# Altium PCB PCB1.PcbDoc
Units mil, origin at the board's own origin, x right, y up, seen from the top; angles counter-clockwise.
Board outline 6185 x 4245 mil, 2 copper layers (Top Layer, Bottom Layer); 97 components, 65 nets, 266 pads, 39 vias.
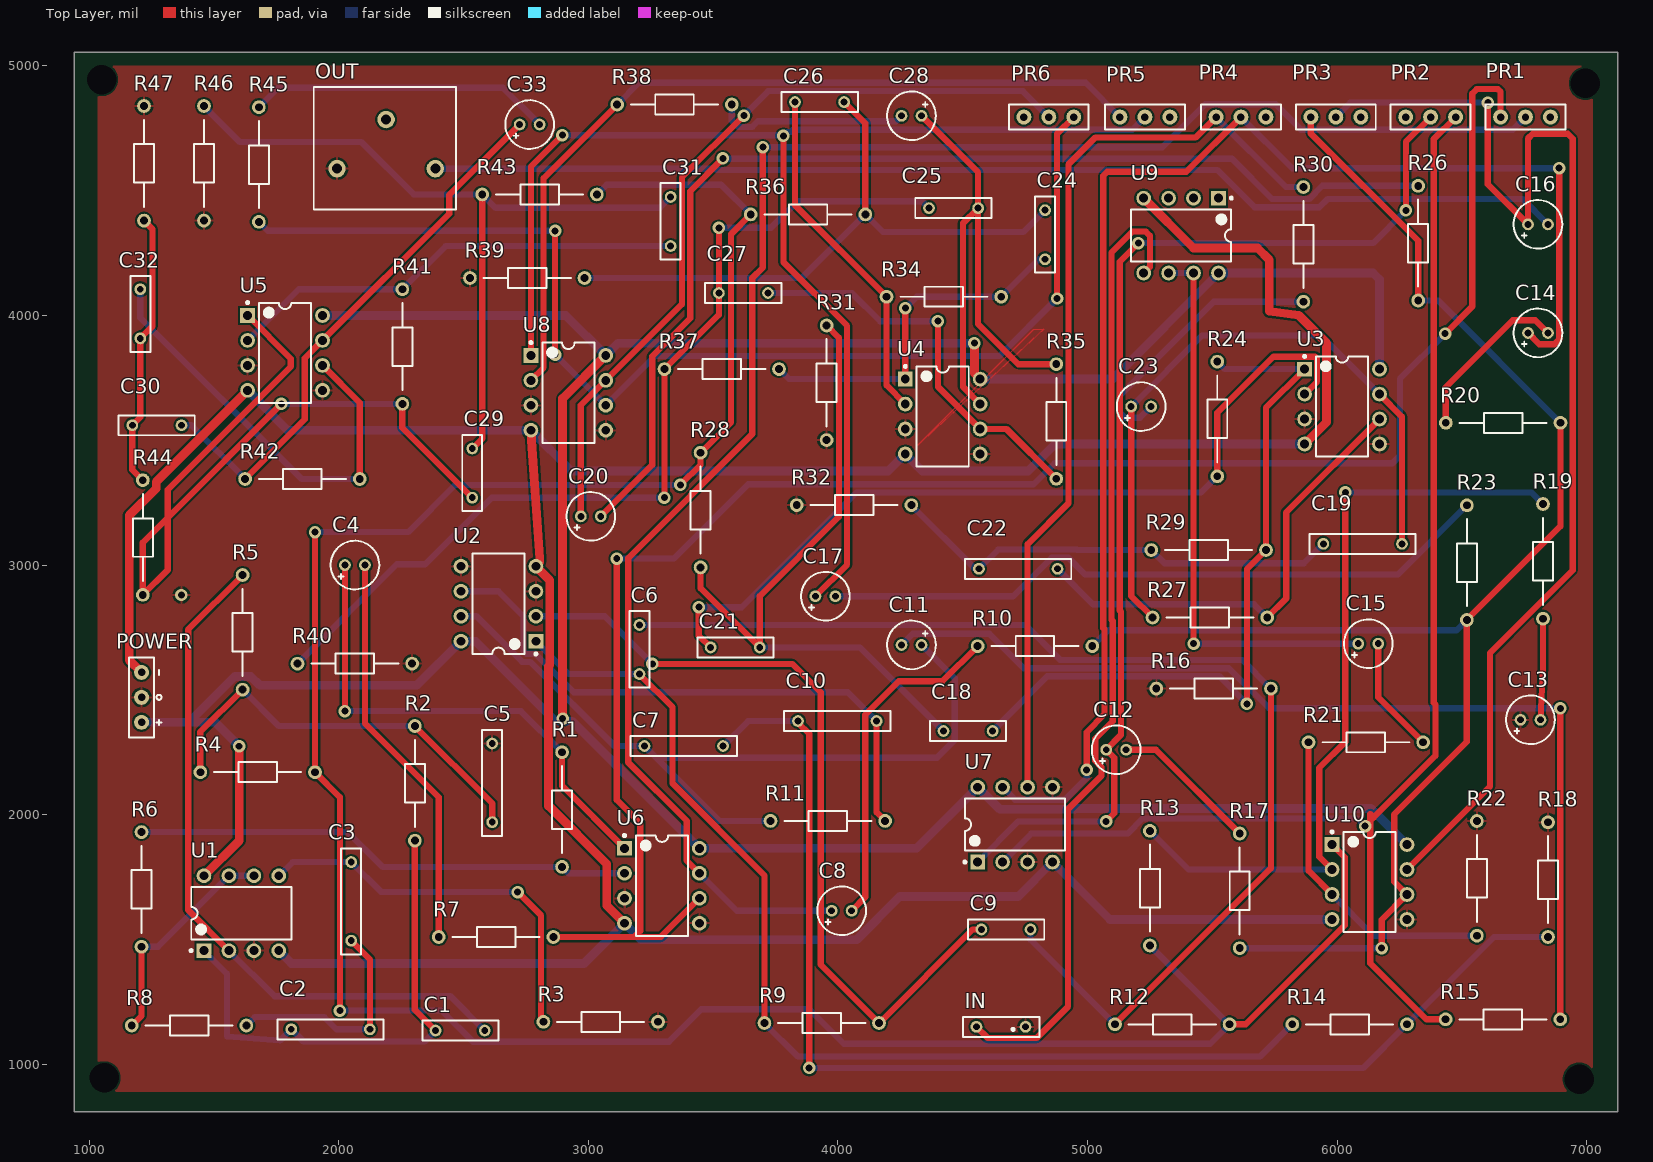
[diagram p0: Top Layer view]
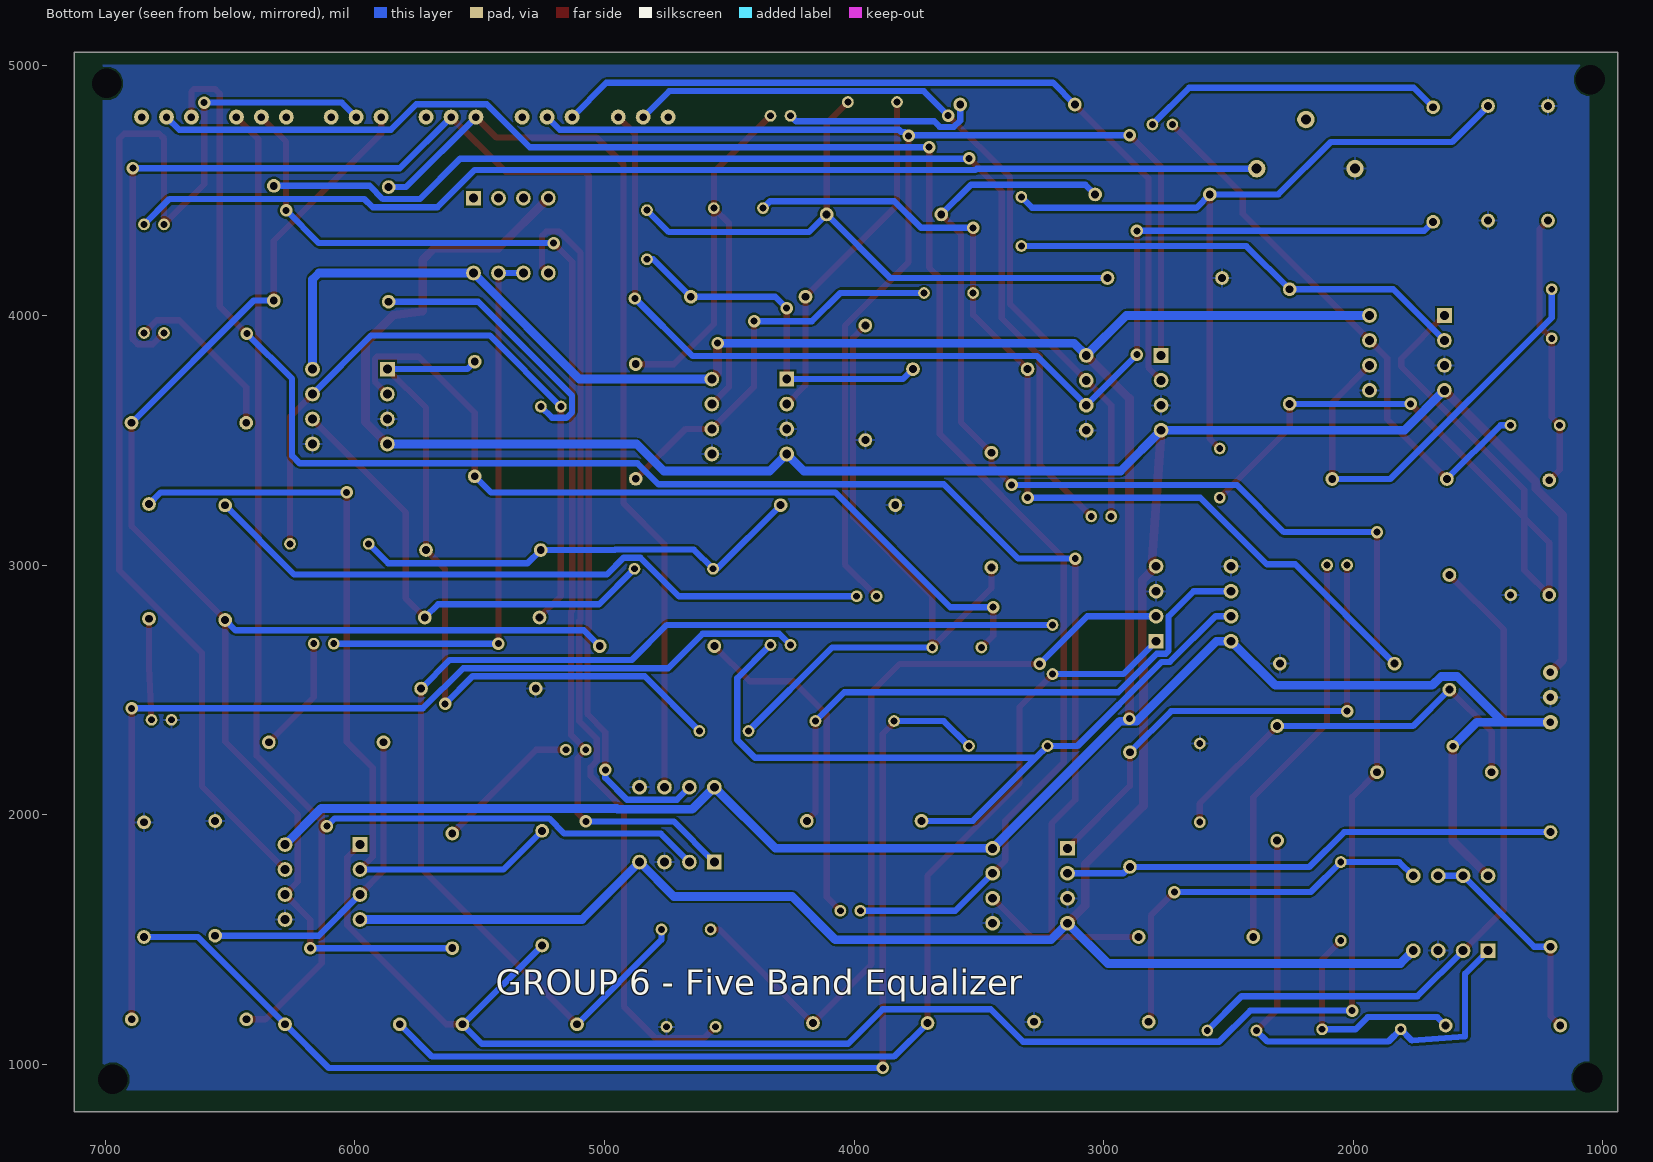
[diagram p1: Bottom Layer view, seen from below]
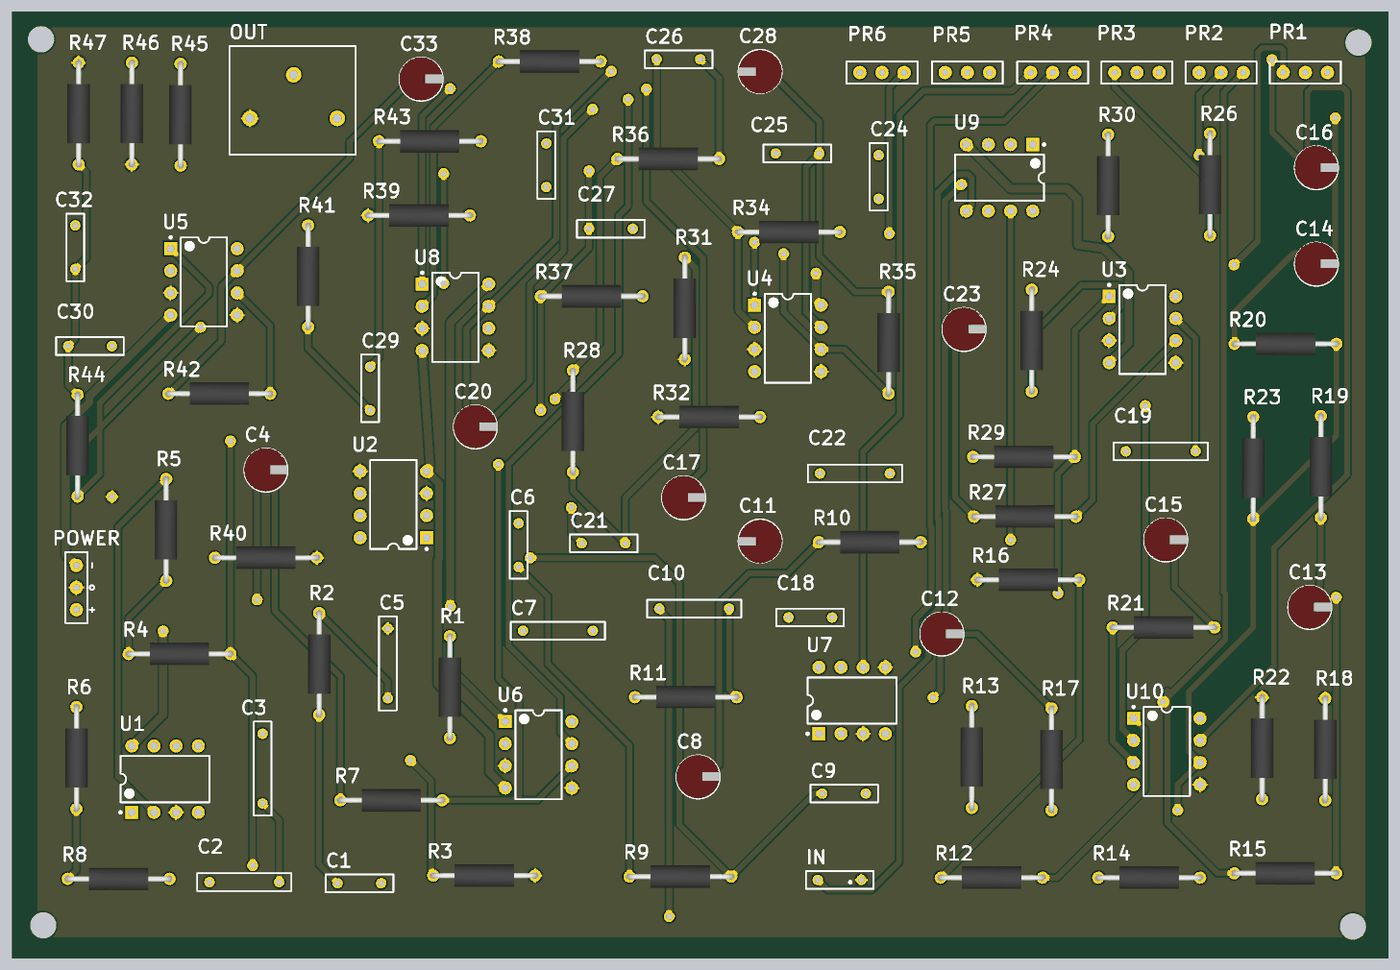
[diagram p2: 3D render of the assembled board from above, using the file's embedded part models]

## Layer stack, top to bottom
Top Solder: solder mask 0.4, Solder Resist, Dk 3.5
Top Layer: signal copper 1.4
Dielectric 1: dielectric 12.6, FR-4, Dk 4.8
Bottom Layer: signal copper 1.4
Bottom Solder: solder mask 0.4, Solder Resist, Dk 3.5

## Board outline
940,810 7125,810 7125,5055 940,5055

## Design rules (kind name [scope] priority, off if disabled: settings)
Clearance [All] p1: gap=8 ignorepadtopadclearanceinfootprint=FALSE
PolygonConnect [All] p1: connectstyle=Relief reliefconductorwidth=10 reliefentries=4 polygonreliefangle="90 Angle" airgapwidth=10
RoutingVias [All] p1: holewidth=28 width=50 viastyle="Through Hole" minholewidth=28 minwidth=50 maxholewidth=28 maxwidth=50
SolderMaskExpansion [All] p1: expansion=4 istentingtop=FALSE
Width [InNetClass('power')] p1: maxlimit=40 minlimit=20 preferedwidth=35
Width Width_1 [InNetClass('All Nets')] p2: maxlimit=40 minlimit=15 preferedwidth=25
30 further rules are at their usual default settings.

## Classes and differential pairs
net class without_gnd: "-10 V" NetC1_1 NetC1_2 NetC2_2 NetC3_2 NetC4_1 NetC4_2 NetC5_2 NetC6_1 NetC6_2 NetC7_1 NetC7_2 NetC8_1 NetC8_2 NetC9_2 NetC10_2 NetC11_2 NetC12_1 NetC12_2 NetC13_2 NetC14_1 NetC14_2 NetC15_1 NetC15_2 NetC16_1 NetC16_2 NetC17_1 NetC17_2 NetC18_1 NetC18_2 NetC19_1 NetC19_2 NetC20_1 NetC20_2 NetC21_2 NetC22_2 NetC23_2 NetC24_1 NetC24_2 NetC25_1 NetC25_2 NetC26_2 NetC27_2 NetC28_2 NetC29_1 NetC29_2 NetC30_1 NetC30_2 NetC31_2 NetC32_2 NetC33_2 NetIN_2 NetPR1_1 NetPR2_1 NetPR3_1 NetPR4_1 NetPR5_1 NetPR6_1 NetR1_1 NetR4_1 NetR6_1 NetR13_1 NetR21_2 VCC
net class power: "-10 V" VCC

## Components (designator, comment, footprint, x,y, rotation, side; value= is the part's Value field where it differs from the comment)
C1 "22nF" 10NF 2585,1135 r180 top
C2 "470nF" 100NF 1810,1140 r0 top
C3 "470nF" 100NF 2050,1495.04 r90 top
C4 "10uF" 10UF 2025,3000 r0 top
C5 "100nF" 100NF 2615,2285 r270 top
C6 "15nF" 10NF 3205,2760 r270 top
C7 "100nF" 100NF 3540,2275 r180 top
C8 "10uF" 10UF 3975,1615 r0 top
C9 "15nF" 10NF 4771.85,1540 r180 top
C10 "100nF" 100NF 3840,2375 r0 top
C11 "10uF" 10UF 4335,2680 r180 top
C12 "10uF" 10UF 5075,2260 r0 top
C13 "10uF" 10UF 6735,2380 r0 top
C14 "10uF" 10UF 6765,3930 r0 top
C15 "10uF" 10UF 6085,2685 r0 top
C16 "10uF" 10UF 6765,4365 r0 top
C17 "10uF" 10UF 3910,2875 r0 top
C18 "10nF" 10NF 4423.15,2335 r0 top
C19 "100nF" 100NF 5945.04,3085 r0 top
C20 "10uF" 10UF 2970,3195 r0 top
C21 "10nF" 10NF 3686.85,2670 r180 top
C22 "100nF" 100NF 4565.04,2985 r0 top
C23 "10uF" 10UF 5175,3635 r0 top
C24 "10nF" 10NF 4830,4421.85 r270 top
C25 "20nF" 10NF 4365,4430 r0 top
C26 "10nF" 10NF 4025,4855 r180 top
C27 "20nF" 10NF 3523.15,4090 r0 top
C28 "10uF" 10UF 4335,4800 r180 top
C29 "3.3nF" 10NF 2535,3466.85 r270 top
C30 "33nF" 10NF 1173.15,3560 r0 top
C31 "3.3nF" 10NF 3330,4475 r270 top
C32 "33nF" 10NF 1205,3908.15 r90 top
C33 "10uF" 10UF 2725,4765 r0 top
IN "IN" AUDIO_IN 4751.85,1150 r180 top
OUT "OUT" AUDIO_OUT 2190,4785 r270 top
POWER "POWER" POWER 1210,2370 r90 top
PR1 "10K VAR" POT 6655,4795 r0 top
PR2 "10K VAR" POT 6475,4795 r180 top
PR3 "10K VAR" POT 5895,4795 r0 top
PR4 "10K VAR" POT 5515,4795 r0 top
PR5 "10K VAR" POT 5130,4795 r0 top
PR6 "10K VAR" POT 4945,4795 r180 top
R1 "1K" RESI 2895,1790.67 r90 top
R2 "15K" RESI 2305,2355 r270 top
R3 "24K" RESI 2820,1170 r0 top
R4 "15K" RESI 1905,2170 r180 top
R5 "7.5K" RESI 1615,2500.67 r90 top
R6 "1K" RESI 1210,1470.67 r90 top
R7 "1K" RESI 2400.67,1510 r0 top
R8 "12K" RESI 1630,1155 r180 top
R9 "30K" RESI 4165,1165 r180 top
R10 "1K" RESI 4560,2675 r0 top
R11 "12K" RESI 4189.33,1975 r180 top
R12 "9.1K" RESI 5569.33,1160 r180 top
R13 "1K" RESI 5250,1935 r270 top
R14 "3.6K" RESI 5820.67,1160 r0 top
R15 "1K" RESI 6894.33,1180 r180 top
R16 "10K" RESI 5275.67,2505 r0 top
R17 "1K" RESI 5610,1924.33 r270 top
R18 "3.9K" RESI 6845,1969.33 r270 top
R19 "1K" RESI 6825,2785 r90 top
R20 "1K" RESI 6435.67,3570 r0 top
R21 "1K" RESI 6345,2290 r180 top
R22 "1K" RESI 6560,1974.33 r270 top
R23 "1K" RESI 6520,3239.33 r270 top
R24 "10K" RESI 5520,3355.67 r90 top
R26 "1K" RESI 6325,4519.33 r270 top
R27 "3K" RESI 5720,2790 r180 top
R28 "3K" RESI 3450,3450 r270 top
R29 "910 OHM" RESI 5715,3060 r180 top
R30 "1K" RESI 5865,4055 r90 top
R31 "6.8K" RESI 3955,3500.67 r90 top
R32 "2K" RESI 3835,3240 r0 top
R34 "5.6K" RESI 4195,4075 r0 top
R35 "5.6K" RESI 4875,3345.67 r90 top
R36 "1.8K" RESI 3650.67,4405 r0 top
R37 "1.8K" RESI 3764.33,3785 r180 top
R38 "1K" RESI 3575,4845 r180 top
R39 "820 OHM" RESI 2525.67,4150 r0 top
R40 "820 OHM" RESI 2294.33,2605 r180 top
R41 "11K" RESI 2255,4105 r270 top
R42 "1.8K" RESI 2084.33,3345 r180 top
R43 "3.6K" RESI 3034.33,4485 r180 top
R44 "620 OHM" RESI 1215,2880.67 r90 top
R45 "1K" RESI 1680,4834.33 r270 top
R46 "750 OHM" RESI 1460,4380 r90 top
R47 "130 OHM" RESI 1220,4839.33 r270 top
U1 "TL072CP" TL0072CP 1610,1605 r90 top
U2 "TL072CP" TL0072CP 2640,2845 r180 top
U3 "TL072CP" TL0072CP 6020,3635 r0 top
U4 "TL072CP" TL0072CP 4420,3595 r0 top
U5 "TL072CP" TL0072CP 1785,3850 r0 top
U6 "NE5532P" NE5532P 3295,1715 r0 top
U7 "NE5532P" NE5532P 4710,1960 r90 top
U8 "NE5532P" NE5532P 2920,3690 r0 top
U9 "TL072CP" TL0072CP 5375,4320 r270 top
U10 "NE5532P" NE5532P 6130,1730 r0 top

## Footprints (in the part's own frame and the unit in brackets; to place one, negate y for a bottom-side part, rotate by r counter-clockwise, add the part's x,y. Pads: shape width x height; smd on the part's side, far side on the other; paste and mask are expansions set on the pad)
10NF [mm]
  round 1.2 hole 0.7: 1(0,0) 2(5,0)
  silkscreen extent -1.4,-1.02 6.35,1.02
10UF [mm]
  round 1.2 hole 0.7: 1(0,0) 2(2.032,0)
  silkscreen extent -1.46,-2.48 3.49,2.48, body extent -1.5,-2.46 3.53,2.54, height 12.51
100NF [mm]
  round 1.2 hole 0.7: 1(0,0) 2(8,0)
  silkscreen extent -1.4,-1.02 9.4,1.02
AUDIO_IN [mm]
  round 1.2 hole 0.7: 1(0,0) 2(5,0)
  silkscreen extent -1.4,-1.02 6.35,1.02
AUDIO_OUT [mil]
  round 70 hole 40: 1(0,0) 2(196.85,-196.85) 3(196.85,196.85)
  silkscreen extent -130,-290 360,280
NE5532P [mm] "DIP, 8-Leads, Body 10.15x6.6mm, Pitch 2.54mm"
  rect 1.5x1.5 hole 0.9: 1(-3.81,3.81)
  round 1.5 hole 0.9: 2(-3.81,1.27) 3(-3.81,-1.27) 4(-3.81,-3.81) 5(3.81,-3.81) 6(3.81,-1.27) 7(3.81,1.27) 8(3.81,3.81)
  silkscreen extent -3.93,-5.1 2.65,5.23, body extent -3.95,-5.07 3.95,5.07, height 5.08
POT [mil]
  round 60 hole 30: 1(0,0) 2(100,0) 3(200,0)
  silkscreen extent -60,-50 260,50
POWER [mil]
  round 60 hole 30: 1(0,0) 2(100,0) 3(200,0)
  silkscreen extent -60,-80 260,50
RESI [mm]
  round 1.4 hole 0.8: 1(0,0) 2(11.667,0)
  silkscreen extent 1.4,-1.02 10.27,1.02, body extent -0.31,-1.29 11.99,1.29, height 2.58
TL0072CP [mm] "DIP, 8-Leads, Body 10.15x6.6mm, Pitch 2.54mm"
  rect 1.5x1.5 hole 0.9: 1(-3.81,3.81)
  round 1.5 hole 0.9: 2(-3.81,1.27) 3(-3.81,-1.27) 4(-3.81,-3.81) 5(3.81,-3.81) 6(3.81,-1.27) 7(3.81,1.27) 8(3.81,3.81)
  silkscreen extent -3.93,-5.1 2.65,5.23, body extent -3.95,-5.07 3.95,5.07, height 5.08

## Part data
C1 C2 C3 C6 C9 C18 C21 C24 C25 C26 C27 C29 C30 C31 C32: Capacitance=100nF, Case/Package=Radial, Manufacturer=Nichicon, Manufacturer Part Number=UKW1H0R1MDD1TD, Max Operating Temperature=85°C, Min Operating Temperature=-40°C, Package Quantity=1, Ripple Current=1.1mA, Supplier Part Number 1=493-10793-1-ND, Tolerance=20%, Voltage Rating=50V, Category="Aluminum Electrolytic Capacitors", ComponentLink1Description=https://datasheet.ciiva.com/29550/e-kw-29550927.pdf?src-supplier=Digi-Key, ComponentLink1URL=https://datasheet.ciiva.com/29550/e-kw-29550927.pdf?src-supplier=Digi-Key, Height - Seated (Max)=0.492inch, Lead Pitch=0.079inch, Life (Hours)=2000Hour, Mount="Through Hole", Packaging="Cut Tape", Pricing 1="1=0.39000, 10=0.26600, 50=0.17720, 100=0.15050, 500=0.10626, 1000=0.09298 (USD)", RoHS=Yes, RoHS Compliant=Yes, Stock 1=3707, Supplier 1=Digi-Key
C4 C8 C11 C12 C13 C14 C15 C16 C17 C20 C23 C28 C33: "YXF series 50V 10uF 5x11mm LS=2mm 105'C 10k HRS Aluminum Electrolytic Capacitor", Case/Package=Radial, Dielectric Material=Aluminium, Manufacturer=Rubycon, Manufacturer Part Number=50YXF10MEFC5X11, Max Operating Temperature=105°C, Min Operating Temperature=-40°C, Package Quantity=3000, Ripple Current=100mA, Supplier Part Number 1=1189-1852-ND, Tolerance=20%, Voltage Rating=50V, Capacitance=10uF, Category="Aluminum Electrolytic Capacitors", ComponentLink1Description=https://datasheet.ciiva.com/7976/e-yxf-7976037.pdf?src-supplier=Element14, ComponentLink1URL=https://datasheet.ciiva.com/7976/e-yxf-7976037.pdf?src-supplier=Element14, ComponentLink2Description=https://datasheet.ciiva.com/6310/e-yxf-6310901.pdf?src-supplier=Digi-Key, ComponentLink2URL=https://datasheet.ciiva.com/6310/e-yxf-6310901.pdf?src-supplier=Digi-Key, Diameter=5mm, Height=11mm, Height - Seated (Max)=0.492inch, Impedance=1.5R, Lead Pitch=2mm, Life (Hours)=5000Hour, Mount="Through Hole", Packaging=Bulk, Pricing 1="1=0.31000, 10=0.21000, 50=0.12580, 100=0.10620, 500=0.07266, 1000=0.06427, 2500=0.06148, 5000=0.05589 (USD)", Radiation Hardening=No, RoHS=Yes, RoHS Compliant=Yes, Series=YXF, Stock 1=126340, Supplier 1=Digi-Key, Termination=Radial
C5 C7 C10 C19 C22: Case/Package=Radial, Manufacturer=Nichicon, Manufacturer Part Number=UKW1H0R1MDD1TD, Max Operating Temperature=85°C, Min Operating Temperature=-40°C, Package Quantity=1, Ripple Current=1.1mA, Supplier Part Number 1=493-10793-1-ND, Tolerance=20%, Voltage Rating=50V, Capacitance=100nF, Category="Aluminum Electrolytic Capacitors", ComponentLink1Description=https://datasheet.ciiva.com/29550/e-kw-29550927.pdf?src-supplier=Digi-Key, ComponentLink1URL=https://datasheet.ciiva.com/29550/e-kw-29550927.pdf?src-supplier=Digi-Key, Height - Seated (Max)=0.492inch, Lead Pitch=0.079inch, Life (Hours)=2000Hour, Mount="Through Hole", Packaging="Cut Tape", Pricing 1="1=0.39000, 10=0.26600, 50=0.17720, 100=0.15050, 500=0.10626, 1000=0.09298 (USD)", RoHS=Yes, RoHS Compliant=Yes, Stock 1=3707, Supplier 1=Digi-Key
IN: library part A_IN
OUT: library part AUDIO
R1 R6 R7 R10 R13 R15 R17 R19 R20 R21 R22 R23 R26 R30 R38 R45: "RES 1K OHM 5% 1/2W AXIAL", Case/Package=Axial, Manufacturer=Yageo, Manufacturer Part Number=CFR-25JB-52-10K, Max Operating Temperature=155°C, Max Power Dissipation=250mW, Min Operating Temperature=-55°C, Package Quantity=200, Resistance=10kR, Resistor Type="Carbon Film", Supplier Part Number 1=CF14JT1K00CT-ND, Temperature Coefficient=500ppm/°C, Tolerance=5%, Category="Through-Hole Resistors", ComponentLink1Description=http://www.yageo.com/NewPortal/yageodocoutput?fileName=/pdf/throughhole/Yageo_LR_CFR_2013.pdf&src-supplier=Digi-Key, ComponentLink1URL=http://www.yageo.com/NewPortal/yageodocoutput?fileName=/pdf/throughhole/Yageo_LR_CFR_2013.pdf&src-supplier=Digi-Key, Lead Free="Lead Free", Length=0.248inch, Number of Terminations=2, Packaging=Bulk, Pricing 1="1=0.10000, 10=0.06800, 25=0.04680, 50=0.03640, 100=0.02600, 250=0.02028, 500=0.01612, 1000=0.01144, 5000=0.00884 (USD)", RoHS=Yes, RoHS Compliant=Yes, Series="Carbon Film", Stock 1=199228, Supplier 1=Digi-Key
R2 R4: "RES 15K OHM 5% 1/2W AXIAL", Case/Package=Axial, Manufacturer=Yageo, Manufacturer Part Number=CFR-25JB-52-10K, Max Operating Temperature=155°C, Max Power Dissipation=250mW, Min Operating Temperature=-55°C, Package Quantity=200, Resistance=10kR, Resistor Type="Carbon Film", Supplier Part Number 1=10KQBK-ND, Temperature Coefficient=500ppm/°C, Tolerance=5%, Category="Through-Hole Resistors", ComponentLink1Description=http://www.yageo.com/NewPortal/yageodocoutput?fileName=/pdf/throughhole/Yageo_LR_CFR_2013.pdf&src-supplier=Digi-Key, ComponentLink1URL=http://www.yageo.com/NewPortal/yageodocoutput?fileName=/pdf/throughhole/Yageo_LR_CFR_2013.pdf&src-supplier=Digi-Key, Lead Free="Lead Free", Length=0.248inch, Number of Terminations=2, Packaging=Bulk, Pricing 1="1=0.10000, 10=0.06800, 25=0.04680, 50=0.03640, 100=0.02600, 250=0.02028, 500=0.01612, 1000=0.01144, 5000=0.00884 (USD)", RoHS=Yes, RoHS Compliant=Yes, Series="Carbon Film", Stock 1=199228, Supplier 1=Digi-Key
R3: "RES 24K OHM 5% 1/2W AXIAL", Case/Package=Axial, Manufacturer=Yageo, Manufacturer Part Number=CFR-25JB-52-10K, Max Operating Temperature=155°C, Max Power Dissipation=250mW, Min Operating Temperature=-55°C, Package Quantity=200, Resistance=10kR, Resistor Type="Carbon Film", Supplier Part Number 1=10KQBK-ND, Temperature Coefficient=500ppm/°C, Tolerance=5%, Category="Through-Hole Resistors", ComponentLink1Description=http://www.yageo.com/NewPortal/yageodocoutput?fileName=/pdf/throughhole/Yageo_LR_CFR_2013.pdf&src-supplier=Digi-Key, ComponentLink1URL=http://www.yageo.com/NewPortal/yageodocoutput?fileName=/pdf/throughhole/Yageo_LR_CFR_2013.pdf&src-supplier=Digi-Key, Lead Free="Lead Free", Length=0.248inch, Number of Terminations=2, Packaging=Bulk, Pricing 1="1=0.10000, 10=0.06800, 25=0.04680, 50=0.03640, 100=0.02600, 250=0.02028, 500=0.01612, 1000=0.01144, 5000=0.00884 (USD)", RoHS=Yes, RoHS Compliant=Yes, Series="Carbon Film", Stock 1=199228, Supplier 1=Digi-Key
R5: "RES 7.5K OHM 5% 1/2W AXIAL", Case/Package=Axial, Manufacturer=Yageo, Manufacturer Part Number=CFR-25JB-52-10K, Max Operating Temperature=155°C, Max Power Dissipation=250mW, Min Operating Temperature=-55°C, Package Quantity=200, Resistance=10kR, Resistor Type="Carbon Film", Supplier Part Number 1=10KQBK-ND, Temperature Coefficient=500ppm/°C, Tolerance=5%, Category="Through-Hole Resistors", ComponentLink1Description=http://www.yageo.com/NewPortal/yageodocoutput?fileName=/pdf/throughhole/Yageo_LR_CFR_2013.pdf&src-supplier=Digi-Key, ComponentLink1URL=http://www.yageo.com/NewPortal/yageodocoutput?fileName=/pdf/throughhole/Yageo_LR_CFR_2013.pdf&src-supplier=Digi-Key, Lead Free="Lead Free", Length=0.248inch, Number of Terminations=2, Packaging=Bulk, Pricing 1="1=0.10000, 10=0.06800, 25=0.04680, 50=0.03640, 100=0.02600, 250=0.02028, 500=0.01612, 1000=0.01144, 5000=0.00884 (USD)", RoHS=Yes, RoHS Compliant=Yes, Series="Carbon Film", Stock 1=199228, Supplier 1=Digi-Key
R8 R11: "RES 12K OHM 5% 1/2W AXIAL", Case/Package=Axial, Manufacturer=Yageo, Manufacturer Part Number=CFR-25JB-52-10K, Max Operating Temperature=155°C, Max Power Dissipation=250mW, Min Operating Temperature=-55°C, Package Quantity=200, Resistance=10kR, Resistor Type="Carbon Film", Supplier Part Number 1=10KQBK-ND, Temperature Coefficient=500ppm/°C, Tolerance=5%, Category="Through-Hole Resistors", ComponentLink1Description=http://www.yageo.com/NewPortal/yageodocoutput?fileName=/pdf/throughhole/Yageo_LR_CFR_2013.pdf&src-supplier=Digi-Key, ComponentLink1URL=http://www.yageo.com/NewPortal/yageodocoutput?fileName=/pdf/throughhole/Yageo_LR_CFR_2013.pdf&src-supplier=Digi-Key, Lead Free="Lead Free", Length=0.248inch, Number of Terminations=2, Packaging=Bulk, Pricing 1="1=0.10000, 10=0.06800, 25=0.04680, 50=0.03640, 100=0.02600, 250=0.02028, 500=0.01612, 1000=0.01144, 5000=0.00884 (USD)", RoHS=Yes, RoHS Compliant=Yes, Series="Carbon Film", Stock 1=199228, Supplier 1=Digi-Key
R9: "RES 30K OHM 5% 1/2W AXIAL", Case/Package=Axial, Manufacturer=Yageo, Manufacturer Part Number=CFR-25JB-52-10K, Max Operating Temperature=155°C, Max Power Dissipation=250mW, Min Operating Temperature=-55°C, Package Quantity=200, Resistance=10kR, Resistor Type="Carbon Film", Supplier Part Number 1=10KQBK-ND, Temperature Coefficient=500ppm/°C, Tolerance=5%, Category="Through-Hole Resistors", ComponentLink1Description=http://www.yageo.com/NewPortal/yageodocoutput?fileName=/pdf/throughhole/Yageo_LR_CFR_2013.pdf&src-supplier=Digi-Key, ComponentLink1URL=http://www.yageo.com/NewPortal/yageodocoutput?fileName=/pdf/throughhole/Yageo_LR_CFR_2013.pdf&src-supplier=Digi-Key, Lead Free="Lead Free", Length=0.248inch, Number of Terminations=2, Packaging=Bulk, Pricing 1="1=0.10000, 10=0.06800, 25=0.04680, 50=0.03640, 100=0.02600, 250=0.02028, 500=0.01612, 1000=0.01144, 5000=0.00884 (USD)", RoHS=Yes, RoHS Compliant=Yes, Series="Carbon Film", Stock 1=199228, Supplier 1=Digi-Key
R12: "RES 9.1K OHM 5% 1/2W AXIAL", Case/Package=Axial, Manufacturer=Yageo, Manufacturer Part Number=CFR-25JB-52-10K, Max Operating Temperature=155°C, Max Power Dissipation=250mW, Min Operating Temperature=-55°C, Package Quantity=200, Resistance=10kR, Resistor Type="Carbon Film", Supplier Part Number 1=10KQBK-ND, Temperature Coefficient=500ppm/°C, Tolerance=5%, Category="Through-Hole Resistors", ComponentLink1Description=http://www.yageo.com/NewPortal/yageodocoutput?fileName=/pdf/throughhole/Yageo_LR_CFR_2013.pdf&src-supplier=Digi-Key, ComponentLink1URL=http://www.yageo.com/NewPortal/yageodocoutput?fileName=/pdf/throughhole/Yageo_LR_CFR_2013.pdf&src-supplier=Digi-Key, Lead Free="Lead Free", Length=0.248inch, Number of Terminations=2, Packaging=Bulk, Pricing 1="1=0.10000, 10=0.06800, 25=0.04680, 50=0.03640, 100=0.02600, 250=0.02028, 500=0.01612, 1000=0.01144, 5000=0.00884 (USD)", RoHS=Yes, RoHS Compliant=Yes, Series="Carbon Film", Stock 1=199228, Supplier 1=Digi-Key
R14 R43: "RES 3.6K OHM 5% 1/2W AXIAL", Case/Package=Axial, Manufacturer=Yageo, Manufacturer Part Number=CFR-25JB-52-10K, Max Operating Temperature=155°C, Max Power Dissipation=250mW, Min Operating Temperature=-55°C, Package Quantity=200, Resistance=10kR, Resistor Type="Carbon Film", Supplier Part Number 1=10KQBK-ND, Temperature Coefficient=500ppm/°C, Tolerance=5%, Category="Through-Hole Resistors", ComponentLink1Description=http://www.yageo.com/NewPortal/yageodocoutput?fileName=/pdf/throughhole/Yageo_LR_CFR_2013.pdf&src-supplier=Digi-Key, ComponentLink1URL=http://www.yageo.com/NewPortal/yageodocoutput?fileName=/pdf/throughhole/Yageo_LR_CFR_2013.pdf&src-supplier=Digi-Key, Lead Free="Lead Free", Length=0.248inch, Number of Terminations=2, Packaging=Bulk, Pricing 1="1=0.10000, 10=0.06800, 25=0.04680, 50=0.03640, 100=0.02600, 250=0.02028, 500=0.01612, 1000=0.01144, 5000=0.00884 (USD)", RoHS=Yes, RoHS Compliant=Yes, Series="Carbon Film", Stock 1=199228, Supplier 1=Digi-Key
R16 R24: "RES 10K OHM 5% 1/2W AXIAL", Case/Package=Axial, Manufacturer=Yageo, Manufacturer Part Number=CFR-25JB-52-10K, Max Operating Temperature=155°C, Max Power Dissipation=250mW, Min Operating Temperature=-55°C, Package Quantity=200, Resistance=10kR, Resistor Type="Carbon Film", Supplier Part Number 1=10KQBK-ND, Temperature Coefficient=500ppm/°C, Tolerance=5%, Category="Through-Hole Resistors", ComponentLink1Description=http://www.yageo.com/NewPortal/yageodocoutput?fileName=/pdf/throughhole/Yageo_LR_CFR_2013.pdf&src-supplier=Digi-Key, ComponentLink1URL=http://www.yageo.com/NewPortal/yageodocoutput?fileName=/pdf/throughhole/Yageo_LR_CFR_2013.pdf&src-supplier=Digi-Key, Lead Free="Lead Free", Length=0.248inch, Number of Terminations=2, Packaging=Bulk, Pricing 1="1=0.10000, 10=0.06800, 25=0.04680, 50=0.03640, 100=0.02600, 250=0.02028, 500=0.01612, 1000=0.01144, 5000=0.00884 (USD)", RoHS=Yes, RoHS Compliant=Yes, Series="Carbon Film", Stock 1=199228, Supplier 1=Digi-Key
R18: "RES 3.9K OHM 5% 1/2W AXIAL", Case/Package=Axial, Manufacturer=Yageo, Manufacturer Part Number=CFR-25JB-52-10K, Max Operating Temperature=155°C, Max Power Dissipation=250mW, Min Operating Temperature=-55°C, Package Quantity=200, Resistance=10kR, Resistor Type="Carbon Film", Supplier Part Number 1=10KQBK-ND, Temperature Coefficient=500ppm/°C, Tolerance=5%, Category="Through-Hole Resistors", ComponentLink1Description=http://www.yageo.com/NewPortal/yageodocoutput?fileName=/pdf/throughhole/Yageo_LR_CFR_2013.pdf&src-supplier=Digi-Key, ComponentLink1URL=http://www.yageo.com/NewPortal/yageodocoutput?fileName=/pdf/throughhole/Yageo_LR_CFR_2013.pdf&src-supplier=Digi-Key, Lead Free="Lead Free", Length=0.248inch, Number of Terminations=2, Packaging=Bulk, Pricing 1="1=0.10000, 10=0.06800, 25=0.04680, 50=0.03640, 100=0.02600, 250=0.02028, 500=0.01612, 1000=0.01144, 5000=0.00884 (USD)", RoHS=Yes, RoHS Compliant=Yes, Series="Carbon Film", Stock 1=199228, Supplier 1=Digi-Key
R27 R28: "RES 3K OHM 5% 1/2W AXIAL", Case/Package=Axial, Manufacturer=Yageo, Manufacturer Part Number=CFR-25JB-52-10K, Max Operating Temperature=155°C, Max Power Dissipation=250mW, Min Operating Temperature=-55°C, Package Quantity=200, Resistance=10kR, Resistor Type="Carbon Film", Supplier Part Number 1=10KQBK-ND, Temperature Coefficient=500ppm/°C, Tolerance=5%, Category="Through-Hole Resistors", ComponentLink1Description=http://www.yageo.com/NewPortal/yageodocoutput?fileName=/pdf/throughhole/Yageo_LR_CFR_2013.pdf&src-supplier=Digi-Key, ComponentLink1URL=http://www.yageo.com/NewPortal/yageodocoutput?fileName=/pdf/throughhole/Yageo_LR_CFR_2013.pdf&src-supplier=Digi-Key, Lead Free="Lead Free", Length=0.248inch, Number of Terminations=2, Packaging=Bulk, Pricing 1="1=0.10000, 10=0.06800, 25=0.04680, 50=0.03640, 100=0.02600, 250=0.02028, 500=0.01612, 1000=0.01144, 5000=0.00884 (USD)", RoHS=Yes, RoHS Compliant=Yes, Series="Carbon Film", Stock 1=199228, Supplier 1=Digi-Key
R29: "RES 910 OHM 5% 1/2W AXIAL", Case/Package=Axial, Manufacturer=Yageo, Manufacturer Part Number=CFR-25JB-52-10K, Max Operating Temperature=155°C, Max Power Dissipation=250mW, Min Operating Temperature=-55°C, Package Quantity=200, Resistance=10kR, Resistor Type="Carbon Film", Supplier Part Number 1=10KQBK-ND, Temperature Coefficient=500ppm/°C, Tolerance=5%, Category="Through-Hole Resistors", ComponentLink1Description=http://www.yageo.com/NewPortal/yageodocoutput?fileName=/pdf/throughhole/Yageo_LR_CFR_2013.pdf&src-supplier=Digi-Key, ComponentLink1URL=http://www.yageo.com/NewPortal/yageodocoutput?fileName=/pdf/throughhole/Yageo_LR_CFR_2013.pdf&src-supplier=Digi-Key, Lead Free="Lead Free", Length=0.248inch, Number of Terminations=2, Packaging=Bulk, Pricing 1="1=0.10000, 10=0.06800, 25=0.04680, 50=0.03640, 100=0.02600, 250=0.02028, 500=0.01612, 1000=0.01144, 5000=0.00884 (USD)", RoHS=Yes, RoHS Compliant=Yes, Series="Carbon Film", Stock 1=199228, Supplier 1=Digi-Key
R31: "RES 6.8K OHM 5% 1/2W AXIAL", Case/Package=Axial, Manufacturer=Yageo, Manufacturer Part Number=CFR-25JB-52-10K, Max Operating Temperature=155°C, Max Power Dissipation=250mW, Min Operating Temperature=-55°C, Package Quantity=200, Resistance=10kR, Resistor Type="Carbon Film", Supplier Part Number 1=10KQBK-ND, Temperature Coefficient=500ppm/°C, Tolerance=5%, Category="Through-Hole Resistors", ComponentLink1Description=http://www.yageo.com/NewPortal/yageodocoutput?fileName=/pdf/throughhole/Yageo_LR_CFR_2013.pdf&src-supplier=Digi-Key, ComponentLink1URL=http://www.yageo.com/NewPortal/yageodocoutput?fileName=/pdf/throughhole/Yageo_LR_CFR_2013.pdf&src-supplier=Digi-Key, Lead Free="Lead Free", Length=0.248inch, Number of Terminations=2, Packaging=Bulk, Pricing 1="1=0.10000, 10=0.06800, 25=0.04680, 50=0.03640, 100=0.02600, 250=0.02028, 500=0.01612, 1000=0.01144, 5000=0.00884 (USD)", RoHS=Yes, RoHS Compliant=Yes, Series="Carbon Film", Stock 1=199228, Supplier 1=Digi-Key
R32: "RES 2K OHM 5% 1/2W AXIAL", Case/Package=Axial, Manufacturer=Yageo, Manufacturer Part Number=CFR-25JB-52-10K, Max Operating Temperature=155°C, Max Power Dissipation=250mW, Min Operating Temperature=-55°C, Package Quantity=200, Resistance=10kR, Resistor Type="Carbon Film", Supplier Part Number 1=10KQBK-ND, Temperature Coefficient=500ppm/°C, Tolerance=5%, Category="Through-Hole Resistors", ComponentLink1Description=http://www.yageo.com/NewPortal/yageodocoutput?fileName=/pdf/throughhole/Yageo_LR_CFR_2013.pdf&src-supplier=Digi-Key, ComponentLink1URL=http://www.yageo.com/NewPortal/yageodocoutput?fileName=/pdf/throughhole/Yageo_LR_CFR_2013.pdf&src-supplier=Digi-Key, Lead Free="Lead Free", Length=0.248inch, Number of Terminations=2, Packaging=Bulk, Pricing 1="1=0.10000, 10=0.06800, 25=0.04680, 50=0.03640, 100=0.02600, 250=0.02028, 500=0.01612, 1000=0.01144, 5000=0.00884 (USD)", RoHS=Yes, RoHS Compliant=Yes, Series="Carbon Film", Stock 1=199228, Supplier 1=Digi-Key
R34 R35: "RES 5.6K OHM 5% 1/2W AXIAL", Case/Package=Axial, Manufacturer=Yageo, Manufacturer Part Number=CFR-25JB-52-10K, Max Operating Temperature=155°C, Max Power Dissipation=250mW, Min Operating Temperature=-55°C, Package Quantity=200, Resistance=10kR, Resistor Type="Carbon Film", Supplier Part Number 1=10KQBK-ND, Temperature Coefficient=500ppm/°C, Tolerance=5%, Category="Through-Hole Resistors", ComponentLink1Description=http://www.yageo.com/NewPortal/yageodocoutput?fileName=/pdf/throughhole/Yageo_LR_CFR_2013.pdf&src-supplier=Digi-Key, ComponentLink1URL=http://www.yageo.com/NewPortal/yageodocoutput?fileName=/pdf/throughhole/Yageo_LR_CFR_2013.pdf&src-supplier=Digi-Key, Lead Free="Lead Free", Length=0.248inch, Number of Terminations=2, Packaging=Bulk, Pricing 1="1=0.10000, 10=0.06800, 25=0.04680, 50=0.03640, 100=0.02600, 250=0.02028, 500=0.01612, 1000=0.01144, 5000=0.00884 (USD)", RoHS=Yes, RoHS Compliant=Yes, Series="Carbon Film", Stock 1=199228, Supplier 1=Digi-Key
R36 R37 R42: "RES 1.8K OHM 5% 1/2W AXIAL", Case/Package=Axial, Manufacturer=Yageo, Manufacturer Part Number=CFR-25JB-52-10K, Max Operating Temperature=155°C, Max Power Dissipation=250mW, Min Operating Temperature=-55°C, Package Quantity=200, Resistance=10kR, Resistor Type="Carbon Film", Supplier Part Number 1=10KQBK-ND, Temperature Coefficient=500ppm/°C, Tolerance=5%, Category="Through-Hole Resistors", ComponentLink1Description=http://www.yageo.com/NewPortal/yageodocoutput?fileName=/pdf/throughhole/Yageo_LR_CFR_2013.pdf&src-supplier=Digi-Key, ComponentLink1URL=http://www.yageo.com/NewPortal/yageodocoutput?fileName=/pdf/throughhole/Yageo_LR_CFR_2013.pdf&src-supplier=Digi-Key, Lead Free="Lead Free", Length=0.248inch, Number of Terminations=2, Packaging=Bulk, Pricing 1="1=0.10000, 10=0.06800, 25=0.04680, 50=0.03640, 100=0.02600, 250=0.02028, 500=0.01612, 1000=0.01144, 5000=0.00884 (USD)", RoHS=Yes, RoHS Compliant=Yes, Series="Carbon Film", Stock 1=199228, Supplier 1=Digi-Key
R39 R40: "RES 820 OHM 5% 1/2W AXIAL", Case/Package=Axial, Manufacturer=Yageo, Manufacturer Part Number=CFR-25JB-52-10K, Max Operating Temperature=155°C, Max Power Dissipation=250mW, Min Operating Temperature=-55°C, Package Quantity=200, Resistance=10kR, Resistor Type="Carbon Film", Supplier Part Number 1=10KQBK-ND, Temperature Coefficient=500ppm/°C, Tolerance=5%, Category="Through-Hole Resistors", ComponentLink1Description=http://www.yageo.com/NewPortal/yageodocoutput?fileName=/pdf/throughhole/Yageo_LR_CFR_2013.pdf&src-supplier=Digi-Key, ComponentLink1URL=http://www.yageo.com/NewPortal/yageodocoutput?fileName=/pdf/throughhole/Yageo_LR_CFR_2013.pdf&src-supplier=Digi-Key, Lead Free="Lead Free", Length=0.248inch, Number of Terminations=2, Packaging=Bulk, Pricing 1="1=0.10000, 10=0.06800, 25=0.04680, 50=0.03640, 100=0.02600, 250=0.02028, 500=0.01612, 1000=0.01144, 5000=0.00884 (USD)", RoHS=Yes, RoHS Compliant=Yes, Series="Carbon Film", Stock 1=199228, Supplier 1=Digi-Key
R41: "RES 11K OHM 5% 1/2W AXIAL", Case/Package=Axial, Manufacturer=Yageo, Manufacturer Part Number=CFR-25JB-52-10K, Max Operating Temperature=155°C, Max Power Dissipation=250mW, Min Operating Temperature=-55°C, Package Quantity=200, Resistance=10kR, Resistor Type="Carbon Film", Supplier Part Number 1=10KQBK-ND, Temperature Coefficient=500ppm/°C, Tolerance=5%, Category="Through-Hole Resistors", ComponentLink1Description=http://www.yageo.com/NewPortal/yageodocoutput?fileName=/pdf/throughhole/Yageo_LR_CFR_2013.pdf&src-supplier=Digi-Key, ComponentLink1URL=http://www.yageo.com/NewPortal/yageodocoutput?fileName=/pdf/throughhole/Yageo_LR_CFR_2013.pdf&src-supplier=Digi-Key, Lead Free="Lead Free", Length=0.248inch, Number of Terminations=2, Packaging=Bulk, Pricing 1="1=0.10000, 10=0.06800, 25=0.04680, 50=0.03640, 100=0.02600, 250=0.02028, 500=0.01612, 1000=0.01144, 5000=0.00884 (USD)", RoHS=Yes, RoHS Compliant=Yes, Series="Carbon Film", Stock 1=199228, Supplier 1=Digi-Key
R44: "RES 620 OHM 5% 1/2W AXIAL", Case/Package=Axial, Manufacturer=Yageo, Manufacturer Part Number=CFR-25JB-52-10K, Max Operating Temperature=155°C, Max Power Dissipation=250mW, Min Operating Temperature=-55°C, Package Quantity=200, Resistance=10kR, Resistor Type="Carbon Film", Supplier Part Number 1=10KQBK-ND, Temperature Coefficient=500ppm/°C, Tolerance=5%, Category="Through-Hole Resistors", ComponentLink1Description=http://www.yageo.com/NewPortal/yageodocoutput?fileName=/pdf/throughhole/Yageo_LR_CFR_2013.pdf&src-supplier=Digi-Key, ComponentLink1URL=http://www.yageo.com/NewPortal/yageodocoutput?fileName=/pdf/throughhole/Yageo_LR_CFR_2013.pdf&src-supplier=Digi-Key, Lead Free="Lead Free", Length=0.248inch, Number of Terminations=2, Packaging=Bulk, Pricing 1="1=0.10000, 10=0.06800, 25=0.04680, 50=0.03640, 100=0.02600, 250=0.02028, 500=0.01612, 1000=0.01144, 5000=0.00884 (USD)", RoHS=Yes, RoHS Compliant=Yes, Series="Carbon Film", Stock 1=199228, Supplier 1=Digi-Key
R46: "RES 750 OHM 5% 1/2W AXIAL", Case/Package=Axial, Manufacturer=Yageo, Manufacturer Part Number=CFR-25JB-52-10K, Max Operating Temperature=155°C, Max Power Dissipation=250mW, Min Operating Temperature=-55°C, Package Quantity=200, Resistance=10kR, Resistor Type="Carbon Film", Supplier Part Number 1=10KQBK-ND, Temperature Coefficient=500ppm/°C, Tolerance=5%, Category="Through-Hole Resistors", ComponentLink1Description=http://www.yageo.com/NewPortal/yageodocoutput?fileName=/pdf/throughhole/Yageo_LR_CFR_2013.pdf&src-supplier=Digi-Key, ComponentLink1URL=http://www.yageo.com/NewPortal/yageodocoutput?fileName=/pdf/throughhole/Yageo_LR_CFR_2013.pdf&src-supplier=Digi-Key, Lead Free="Lead Free", Length=0.248inch, Number of Terminations=2, Packaging=Bulk, Pricing 1="1=0.10000, 10=0.06800, 25=0.04680, 50=0.03640, 100=0.02600, 250=0.02028, 500=0.01612, 1000=0.01144, 5000=0.00884 (USD)", RoHS=Yes, RoHS Compliant=Yes, Series="Carbon Film", Stock 1=199228, Supplier 1=Digi-Key
R47: "RES 130 OHM 5% 1/2W AXIAL", Case/Package=Axial, Manufacturer=Yageo, Manufacturer Part Number=CFR-25JB-52-10K, Max Operating Temperature=155°C, Max Power Dissipation=250mW, Min Operating Temperature=-55°C, Package Quantity=200, Resistance=10kR, Resistor Type="Carbon Film", Supplier Part Number 1=10KQBK-ND, Temperature Coefficient=500ppm/°C, Tolerance=5%, Category="Through-Hole Resistors", ComponentLink1Description=http://www.yageo.com/NewPortal/yageodocoutput?fileName=/pdf/throughhole/Yageo_LR_CFR_2013.pdf&src-supplier=Digi-Key, ComponentLink1URL=http://www.yageo.com/NewPortal/yageodocoutput?fileName=/pdf/throughhole/Yageo_LR_CFR_2013.pdf&src-supplier=Digi-Key, Lead Free="Lead Free", Length=0.248inch, Number of Terminations=2, Packaging=Bulk, Pricing 1="1=0.10000, 10=0.06800, 25=0.04680, 50=0.03640, 100=0.02600, 250=0.02028, 500=0.01612, 1000=0.01144, 5000=0.00884 (USD)", RoHS=Yes, RoHS Compliant=Yes, Series="Carbon Film", Stock 1=199228, Supplier 1=Digi-Key
U1 U2 U3 U4 U5 U9: "Dual Low-Noise JFET-Input General-Purpose Operational Amplifier, 7 to 36 V, 0 to 70 degC, 8-pin DIP (P8), Pb-Free (RoHS)", Manufacturer="Texas Instruments", Rating=Catalog, Total Supply Voltage(Max)(+5V is 5, +/-5V is 10)=36, Total Supply Voltage(Min)(+5V is 5, +/-5V is 10)=7, CMRR(Min)(dB)=70, Code_JEDEC=MS-001, ComponentLink1Description="Manufacturer URL", ComponentLink1URL=http://www.ti.com/, ComponentLink2Description=Datasheet, ComponentLink2URL=http://www.ti.com/lit/ds/symlink/tl072.pdf, ComponentLink3Description="Package Specification", ComponentLink3URL=http://www.ti.com/litv/pdf/mpdi001b, DatasheetVersion=SLOS080J, Eco-Plan="Pb-Free (RoHS)", GBW(Typ)(MHz)=3, IIB(Max)(pA)=200, Iq per channel(Max)(mA)=2.5, Mounting Technology="Through Hole", Number of Channels=2, Offset Drift(Typ)(uV/C)=18, PackageDescription="8-Pin Plastic In-Line, Body 9.59 x 6.35 mm, Pitch 2.54 mm", PackageReference=P0008A, PackageVersion="4040082/E, 04/2010", PartNumber=TL072CP, Slew Rate(Typ)(V/us)=13, Sub Family="General Purpose Amplifier, High Supply Voltage Amplifier (>=30V)", Vio (25C)(Max)(mV)=10, Vn at 1kHz(Typ)(nV/rtHz)=18
U6 U7 U8 U10: "Dual Low-Noise High-Speed Audio Operational Amplifier, 10 to 30 V, 0 to 70 degC, 8-pin DIP (P8), Pb-Free (RoHS)", Manufacturer="Texas Instruments", Total Supply Voltage(Max)(+5V is 5, +/-5V is 10)=30, Total Supply Voltage(Min)(+5V is 5, +/-5V is 10)=10, CMRR(Min)(dB)=70, Code_JEDEC=MS-001, ComponentLink1Description="Manufacturer URL", ComponentLink1URL=http://www.ti.com/, ComponentLink2Description=Datasheet, ComponentLink2URL=http://www.ti.com/lit/ds/symlink/ne5532.pdf, ComponentLink3Description="Package Specification", ComponentLink3URL=http://www.ti.com/litv/pdf/mpdi001b, DatasheetVersion=SLOS075I, Eco-Plan="Pb-Free (RoHS)", GBW(Typ)(MHz)=10, IIB(Max)(pA)=800000, Iq per channel(Max)(mA)=4, Mounting Technology="Through Hole", Number of Channels=2, PackageDescription="8-Pin Plastic In-Line, Body 9.59 x 6.35 mm, Pitch 2.54 mm", PackageReference=P0008A, PackageVersion="4040082/E, 04/2010", PartNumber=NE5532P, Slew Rate(Typ)(V/us)=9, Sub Family="General Purpose Amplifier, High Supply Voltage Amplifier (>=30V), Low Noise Amp (<=10nV/rtHz)", Vio (25C)(Max)(mV)=4, Vn at 1kHz(Typ)(nV/rtHz)=5

## Free pads (board coordinates)
  round 60 hole 118.11: 16(1050,4945) 17(1060,945) 18(6970,940) 19(6995,4930)

## Via types
v1: diameter 50, hole 28, Top Layer to Bottom Layer, 39 vias

## Nets (pads, with @x,y where several pads share a name; then routed paths per layer and width w, separated by ;. In a path a pad name is that pad's centre, name@x,y a point inside that pad or via, vN(x,y) a via of type N, cw(c..) or ccw(c..) an arc to the next point about the centre after c; other vN are vias at no path point)
"-10 V": POWER.3 U1.4 U2.4 U3.4 U4.4 U5.4 U6.4 U7.4 U8.4 U9.4 U10.4 | length 14037.9
  Top Layer w35: POWER.3 1161,2619 1161,3199 1269,3307 1269,3334 U5.4 ; U8.4 2772.74,3499.8 2805.05,3026.56 2805.05,3012.25 2796.42,3002.36 U2.4 2846,2939 2846,2599.87 2841,2594.87 2841,2035 3074,1802 3074,1636 U6.4 ; U9.4 5425,4270 5681,4270 5728,4223 5728,4017 5846,4001 5958.03,3888.97 5958.03,3573.03 U3.4
  Bottom Layer w35: U5.4 1795,3540 U8.4 2933,3377 4202,3377 U4.4 4337.88,3377.12 4763.12,3377.12 4871,3485 U3.4 ; U1.4 1811,1404 2984,1404 U6.4 3211,1499 4075,1499 4248,1672 4722,1672 U7.4 5090,1580 U10.4
GND: C5.1 C13.1 IN.1 OUT.2 POWER.2 R3.2 R16.1 R18.1 R22.1 R31.1 R32.1 R39.1 R40.1 R46.1 R47.1 U1.3 U2.3 U2.5 U3.3 U3.5 U4.3 U4.5 U5.3 U5.5 U6.3 U6.5 U7.3 U7.5 U8.3 U8.5 U10.5
  other v1: 1370,2880
NetC1_1: C1.1 R5.2 U1.2 | length 2820.4
  Top Layer w25: U1.2 1397,1618 1397,2742 R5.2
  Bottom Layer w25: U1.2 1743,1272 2448,1272 C1.1
NetC1_2: C1.2 C2.1 R2.2 U1.1 | length 2071.1
  Top Layer w25: R2.2 2305,1218.15 C1.2
  Bottom Layer w25: U1.1 1552,1363 1552,1111 1765,1095 C2.1 1859,1091 2344.15,1091 C1.2
NetC2_2: C2.2 C3.1 R8.1 | length 915.4
  Top Layer w25: C3.1 2124.96,1420.08 C2.2
  Bottom Layer w25: R8.1 1664,1189 1942,1189 1991,1140 C2.2
NetC3_2: C3.2 R3.1 U1.5 | length 1597.4
  Top Layer w25: v1(2717,1690) 2811,1596 2811,1170 R3.1
  Bottom Layer w25: U1.5 1815,1810 C3.2 2170,1690 v1(2717,1690)
NetC4_1: C4.1 R1.2 U6.1 | length 2011.9
  Top Layer w25: v1(2025,2415) C4.1 ; R1.2 2895,2115 U6.1
  Bottom Layer w25: v1(2025,2415) 2730,2415 R1.2
NetC4_2: C4.2 R7.1 | length 1612.5
  Top Layer w25: C4.2 2105,2365.67 2400.67,2070 R7.1
NetC5_2: C5.2 R2.1 R4.2 R5.1 | length 1664.5
  Top Layer w25: R4.2 1445.67,2331.34 R5.1 ; R2.1 2615,2045 C5.2
  Bottom Layer w25: R5.1 1760.67,2355 R2.1
NetC6_1: C6.1 C9.1 R12.2 R16.2 | length 4759.6
  Top Layer w25: R12.2 5735,1785 R16.2
  Bottom Layer w25: C6.1 4750,2760 4890,2620 5620,2620 R16.2 ; C9.1 4771.85,1498.15 R12.2
NetC6_2: C6.2 R9.2 R14.1 U2.1 | length 4299.5
  Top Layer w25: C6.2 3337.63,2430.52 3337.63,2124.71 3705.67,1756.67 R9.2
  Bottom Layer w25: U2.1 2921.85,2563.15 C6.2 ; R9.2 3840.17,1030.5 5691.17,1030.5 R14.1
NetC7_1: C7.1 C10.1 R14.2 R18.2 | length 4927.5
  Top Layer w25: C10.1 3840,2368.99 3885,2323.99 v1(3885,985)
  Bottom Layer w25: C7.1 3640,2375 C10.1 ; v1(3885,985) 6105,985 R14.2 6630,1510 R18.2
NetC7_2: C7.2 C11.1 R11.2 U2.7 | length 3241.1
  Bottom Layer w25: U2.7 2551.97,2795 2735,2611.97 2768.03,2611.97 3105,2275 C7.2 3272.04,2228 ; R11.2 3525.04,1975 3272.04,2228 ; C11.1 4468,2547 4468,2299 4397,2228 3272.04,2228
NetC8_1: C8.1 PR1.2 U6.7 | length 7033.1
  Top Layer w25: U6.7 3394,1816 3394,1975 3160,2209 3160,3028 3657,3525 3657,4150 3699,4192 v1(3699,4674)
  Bottom Layer w25: U6.7 3595,1615 C8.1 ; v1(3699,4674) 5300,4674 5472,4846 5754,4846 5856,4744 6704,4744 PR1.2
NetC8_2: C8.2 R10.1 | length 1371.7
  Top Layer w25: C8.2 4110,1670 4110,2400 4244,2534 4419,2534 R10.1
NetC9_2: C9.2 R9.1 U2.2 | length 3254.6
  Top Layer w25: v1(3257,2604) 3817,2604 3930.88,2490.12 3930.88,1399.12 R9.1 4540,1540 C9.2
  Bottom Layer w25: U2.2 3066,2795 v1(3257,2604)
NetC10_2: C10.2 R11.1 U2.6 | length 2376
  Top Layer w25: C10.2 4154.96,2009.37 R11.1
  Bottom Layer w25: U2.6 2639.97,2895 2739.97,2795 2739.97,2656 2751,2644.97 2787.03,2644.97 2942,2490 4039.96,2490 C10.2
NetC11_2: C11.2 R15.1 | length 4027.8
  Top Layer w25: R15.1 v1(6894.33,2426)
  Bottom Layer w25: C11.2 4300,2725 4607,2725 4745,2587 5566.5,2587 5727.5,2426 v1(6894.33,2426)
NetC12_1: C12.1 PR2.2 U7.1 | length 4524.9
  Top Layer w25: v1(5075,1973) 5107.5,2005.5 5107.5,2227.5 C12.1 5134,2319 5134,2813 5129.5,2817.5 5129.5,4215.5 v1(5204,4290) ; v1(6276,4421) 6276,4696 PR2.2
  Bottom Layer w25: U7.1 4723,1973 v1(5075,1973) ; v1(5204,4290) 6145,4290 v1(6276,4421)
NetC12_2: C12.2 R17.1 | length 594
  Top Layer w25: C12.2 5274.33,2260 R17.1
NetC13_2: C13.2 R19.1 | length 405.2
  Top Layer w25: C13.2 6825,2593 R19.1
NetC14_1: C14.1 PR4.2 U7.7 | length 5684.3
  Top Layer w25: v1(4997,2178.97) 4997,2330.52 5068,2401.52 5068,2742.5 5063.5,2747 5063.5,4560 5079.5,4576 5396,4576 PR4.2 ; C14.1 6810,3885 6871,3885 6890,3904 v1(6890,4590)
  Bottom Layer w25: U7.7 4710.03,2059.97 4910,2059.97 4997,2146.97 v1(4997,2178.97) ; PR4.2 5820,4590 v1(6890,4590)
NetC14_2: C14.2 R20.1 | length 684.3
  Top Layer w25: R20.1 6435.67,3712.67 6704,3981 6794,3981 C14.2
NetC15_1: C15.1 U9.6 U9.7 | length 2245
  Top Layer w25: v1(5425,2685) U9.7
  Bottom Layer w25: U9.6 U9.7 ; v1(5425,2685) C15.1
NetC15_2: C15.2 R21.1 | length 469.6
  Top Layer w25: C15.2 6165,2470 R21.1
NetC16_1: C16.1 PR3.2 U10.7 | length 4929.9
  Top Layer w25: U10.7 6613,2113 6613,2648 6944,2979 6944,4708 6924,4728 6784,4728 6765,4709 C16.1 6604,4526 v1(6604,4853)
  Bottom Layer w25: PR3.2 6053,4853 v1(6604,4853)
NetC16_2: C16.2 OUT.3 | length 4578.1
  Bottom Layer w25: OUT.3 3508.44,4588.15 3513.35,4583.24 5519.52,4583.24 5669.5,4433.27 5928.75,4433.27 5962,4466.53 6743.47,4466.53 C16.2
NetC17_1: C17.1 PR5.2 U8.1 | length 5305
  Top Layer w25: U8.1 2770,4596 v1(2896.37,4722.37) ; v1(3782,4720) 3782,4213 4037,3958 4037,3002 C17.1
  Bottom Layer w25: v1(2896.37,4722.37) 3782,4722.37 v1(3782,4720) 3796.87,4734.87 3810.79,4734.87 3819.92,4744 5179,4744 PR5.2
NetC17_2: C17.2 R23.1 | length 2736.5
  Bottom Layer w25: C17.2 4702,2875 4856.12,3029.12 4924,3029.12 4991.12,2962 6242.67,2962 R23.1
NetC18_1: C18.1 C21.1 R28.2 R31.2 | length 2735.5
  Top Layer w25: R28.2 3450,2906.85 C21.1 3686.85,2875.85 4004,3193 4004,3911 R31.2
  Bottom Layer w25: C21.1 4088.15,2670 C18.1
NetC18_2: C18.2 R24.2 R29.1 U3.1 | length 2954.4
  Top Layer w25: v1(5639,2444) 5639,2984 R29.1 5715,3630 U3.1
  Bottom Layer w25: C18.2 4839,2554 5529,2554 v1(5639,2444) ; R24.2 5550,3785 U3.1
NetC19_1: C19.1 C22.1 R29.2 R32.2 | length 1843.4
  Bottom Layer w25: R32.2 4549.33,2985 C22.1 4642.16,3062.12 4957.12,3062.12 4959.24,3060 R29.2 5308.67,3007 5867.04,3007 C19.1
NetC19_2: C19.2 C23.1 R27.2 U3.7 | length 2728.2
  Top Layer w25: C23.1 5175,2875.67 R27.2 ; U3.7 6260,3595 C19.2
  Bottom Layer w25: C23.1 5460,3920 5935,3920 U3.7
NetC20_1: C20.1 PR6.2 U8.7 | length 3182.3
  Top Layer w25: C20.1 2970,3640 U8.7 3375,4045 3375,4553 v1(3623,4801)
  Bottom Layer w25: v1(3623,4801) 3721.12,4899.12 4740.88,4899.12 PR6.2
NetC20_2: C20.2 R26.1 | length 4511.9
  Top Layer w25: C20.2 3256,3401 3256,3837 3408,3989 3408,4498 v1(3539,4629)
  Bottom Layer w25: v1(3539,4629) 3540,4628 5579,4628 5740.73,4466.27 5888,4466.27 5941.06,4519.33 R26.1
NetC21_2: C21.2 R24.1 U3.2 | length 3388.4
  Top Layer w25: v1(3443,2831) 3443,2717 C21.2 ; R24.1 5520,3610 5745.03,3835.03 5912,3835.03 5920.03,3827 5920.03,3735.03 U3.2
  Bottom Layer w25: v1(3443,2831) 3615,2831 4075,3291 5455.33,3291 R24.1
NetC22_2: C22.2 R27.1 U3.6 | length 1902.2
  Top Layer w25: R27.1 5796,2866 5796,3211 U3.6
  Bottom Layer w25: C22.2 5022,2843 5667,2843 R27.1
NetC23_2: C23.2 R30.1 | length 1110.5
  Bottom Layer w25: C23.2 5210,3590 5152,3590 5130,3612 5130,3679 5506,4055 R30.1
NetC24_1: C24.1 C26.1 R36.2 R39.2 | length 2501.6
  Top Layer w25: C26.1 4110,4770 R36.2
  Bottom Layer w25: R39.2 3855,4150 R36.2 4181,4334 4742.15,4334 C24.1
NetC24_2: C24.2 R34.2 R37.1 U4.1 | length 1447.4
  Top Layer w25: U4.1 v1(4270,4029)
  Bottom Layer w25: R37.1 3804.33,3745 U4.1 ; v1(4270,4029) 4316,4075 R34.2 4804.33,4225 C24.2
NetC25_1: C25.1 C27.1 R37.2 R40.2 | length 3814.6
  Top Layer w25: v1(3305,3270) R37.2 3523.15,4003.15 C27.1 v1(3523.15,4351)
  Bottom Layer w25: R40.2 2233,3003 2346,3003 2613,3270 v1(3305,3270) ; v1(3523.15,4351) 3732,4351 3839,4458 4337,4458 C25.1
NetC25_2: C25.2 C28.1 R35.2 U4.7 | length 2146.8
  Top Layer w25: C28.1 4561.85,4573.15 C25.2 ; U4.7 4501.24,3713.76 4501.24,4369.39 C25.2 ; R35.2 4722.16,3805 4561.85,3965.31 C25.2
NetC26_2: C26.2 R34.1 U4.2 | length 1393
  Top Layer w25: C26.2 3828.15,4441.85 R34.1 4195,3720 U4.2
NetC27_2: C27.2 R35.1 U4.6 | length 1617.4
  Top Layer w25: v1(4401,3977) 4401,3714 U4.6 4675.67,3545 R35.1
  Bottom Layer w25: C27.2 4056,4090 4169,3977 v1(4401,3977)
NetC28_2: C28.2 R38.1 | length 773.3
  Bottom Layer w25: R38.1 3575,4780.5 3600,4755.5 3656.43,4755.5 3678.81,4777.88 4232.88,4777.88 C28.2
NetC29_1: C29.1 C31.1 R43.2 R46.2 | length 3091.3
  Top Layer w25: C29.1 2575,3506.85 R43.2
  Bottom Layer w25: R46.2 1604.33,4695 2091,4695 2301,4485 R43.2 2628,4432 3287,4432 C31.1
NetC29_2: C29.2 R41.2 R44.1 U5.1 | length 3407.8
  Top Layer w25: U5.1 1808,3827 1808,3795 1314.59,3301.59 1314.59,3189.59 ; v1(1770.67,3645.67) 1314.59,3189.59 ; R41.2 2255,3550 C29.2 ; 1314.59,3189.59 1215,3090 R44.1 1314.59,2980.26 1314.59,3189.59
  Bottom Layer w25: v1(1770.67,3645.67) R41.2
NetC30_1: C30.1 C32.1 R44.2 R47.2 | length 1104.9
  Top Layer w25: R44.2 1173.15,3381.85 C30.1 1205,3591.85 C32.1 1254,3957.15 1254,4346 R47.2
NetC30_2: C30.2 C33.1 R42.2 U5.7 | length 2219.7
  Top Layer w25: R42.2 1864,3584 1864,3829 U5.7 2443,4408 2443,4483 C33.1
  Bottom Layer w25: C30.2 1410,3560 R42.2
NetC31_2: C31.2 R41.1 U5.2 | length 1851.6
  Bottom Layer w25: U5.2 1840,4105 R41.1 2428.15,4278.15 C31.2
NetC32_2: C32.2 R42.1 U5.6 | length 1777.8
  Top Layer w25: U5.6 2084.33,3650.67 R42.1
  Bottom Layer w25: C32.2 1205,3991 1851,3345 R42.1
NetC33_2: C33.2 R45.1 | length 1218.1
  Bottom Layer w25: R45.1 1757.67,4912 2658,4912 C33.2
NetIN_2: IN.2 U9.5 | length 3911.2
  Top Layer w25: IN.2 4600,1105 4796,1105 4922,1231 4922,2020.76 5056,2154.76 5056,2190.76 5030.88,2215.88 5030.88,2304 5101,2374.12 5101,2775.5 5096.5,2780 5096.5,4252.5 5180,4336 5234,4336 5250,4320 5250,4195 U9.5
NetPR1_1: PR1.1 R7.2 U6.6 | length 7319.9
  Top Layer w25: R7.2 3184,1510 ; v1(3114,3026) 3114,2059 3208,1965 3208,1534 3184,1510 ; U6.6 3290,1510 3184,1510 ; v1(6433,3927) 6542,4036 6542,4889 6560,4907 6644,4907 6655,4896 PR1.1
  Bottom Layer w25: v1(3114,3026) 3343,3026 3641,3324 4784,3324 4868,3408 6222,3408 6252,3438 6252,3746 v1(6433,3927)
NetPR2_1: PR2.1 R15.2 U7.2 | length 5547.5
  Top Layer w25: v1(6112,1954) 6133,1975 ; R15.2 6358,1180 6133,1405 6133,1975 ; PR2.1 6387,4707 6387,2448 6394,2441 6394,2236 6147,1989 ; 6133,1975 6147,1989 ; 6133,1975 6133,2003 6147,1989
  Bottom Layer w25: U7.2 4774,1924 5161,1924 5222,1985 6081,1985 v1(6112,1954)
NetPR3_1: PR3.1 R10.2 R17.2 R20.2 R23.2 R26.2 U10.6 | length 6243.1
  Top Layer w25: PR3.1 5895,4729.1 6325,4299.1 R26.2 ; v1(6179,1465) 6179,1579 U10.6 6229,1731 6229,2001 6520,2292 R23.2 6895,3155 R20.2
  Bottom Layer w25: R10.2 5083.33,2739 6479,2739 R23.2 ; R17.2 v1(6179,1465) ; R26.2 6405,4060 R20.2
NetPR4_1: PR4.1 R30.2 U7.6 | length 3698.9
  Top Layer w25: U7.6 4760,3084 4924,3248 4924,4605 5032,4713 5433,4713 PR4.1
  Bottom Layer w25: PR4.1 5795.67,4514.33 R30.2
NetPR5_1: PR5.1 R38.2 U8.2 | length 3355.4
  Top Layer w25: U8.2 2821,3791 2821,4550.33 R38.2
  Bottom Layer w25: R38.2 3202.79,4932.12 4992.88,4932.12 PR5.1
NetPR6_1: PR6.1 R45.2 U8.6 | length 4725
  Top Layer w25: v1(2867,3843) v1(2867,4339) ; v1(4878,4068) 4878,4728 PR6.1
  Bottom Layer w25: R45.2 1716,4339 v1(2867,4339) ; v1(2867,3843) U8.6 3268,3838 4648,3838 v1(4878,4068)
NetR1_1: R1.1 R6.2 U6.2 | length 2003.3
  Bottom Layer w25: R6.2 2036,1930 2175.33,1790.67 R1.1 2920.67,1765 U6.2
NetR4_1: R4.1 R12.1 R13.2 R28.1 R36.1 R43.1 U10.1 | length 10563.2
  Top Layer w25: v1(1905,3132) R4.1 2005,2070 v1(2005,1215) ; v1(3369,3321) 3450,3402 R28.1 3572,3572 3572,4326.33 R36.1 ; R12.1 5634.53,1160 6031,1556.47 6031,1829 U10.1
  Bottom Layer w25: v1(1905,3132) 2278,3132 2467,3321 v1(3369,3321) ; v1(2005,1215) 2413,1215 2538,1090 3323,1090 3453,1220 3886,1220 4024,1082 5491.33,1082 R12.1 5565.67,1160 R13.2 ; R43.1 3073.33,4524 3531.67,4524 R36.1
NetR6_1: R6.1 R8.2 U1.6 U1.7 | length 899.7
  Top Layer w25: R8.2 1210,1194.33 R6.1
  Bottom Layer w25: R6.1 1275.67,1470.67 U1.7 U1.6
NetR13_1: R13.1 R19.2 U10.2 | length 3180.7
  Top Layer w25: U10.2 5929,1831 5929,2187 6033,2291 v1(6033,3291)
  Bottom Layer w25: R13.1 5405,1780 U10.2 ; v1(6033,3291) 6778.33,3291 R19.2
NetR21_2: R21.2 R22.2 U10.3 | length 1297.4
  Top Layer w25: R21.2 5885.67,1774.33 U10.3
  Bottom Layer w25: U10.3 6145,1515 R22.2
VCC: POWER.1 U1.8 U2.8 U3.8 U4.8 U5.8 U6.8 U7.8 U8.8 U9.8 U10.8 | length 13150
  Top Layer w35: U1.8 1601,1896 v1(1601,2274) ; v1(2897,2385) 2897,3667 U8.8 ; v1(4547,3889) 4547,3768 U4.8
  Bottom Layer w35: POWER.1 1400.27,2370 ; v1(1601,2274) 1505,2370 1400.27,2370 ; U5.8 2910,4000 U8.8 3119,3889 v1(4547,3889) ; v1(2897,2385) 2868.74,2374.2 ; U4.8 5100,3745 U9.8 6144,4170 6170,4144 U3.8 ; U10.8 6135,2025 4951.06,2025 4948.03,2021.97 4648.03,2021.97 U7.8 4315,1865 U6.8 2935.8,2374.2 2868.74,2374.2 ; 1400.27,2370 1584,2553.73 1648,2553.73 1683.73,2518 2313,2518 U2.8 2547.94,2695 2868.74,2374.2
pads on no net: OUT.1 PR1.3 PR2.3 PR3.3 PR4.3 PR5.3 PR6.3 U9.1 U9.2 U9.3

## Polygon pours and split planes (outlines as drawn)
GND on Bottom Layer "NONET_L-01_P-001" (solid, remove dead copper, pour order 0): 1055,4980 1055,895 7005,895 7010,890 7010,5005 1055,5005 1050,5000
GND on Top Layer "NONET_L-01_P-001" (solid, remove dead copper, pour order 2): 4320,3480 4785,3945 4825,3945
GND on Top Layer "NONET_L-01_P-001" (solid, remove dead copper, pour order 1): 1045,4990 1035,4980 1035,890 7020,890 7025,895 7025,5000 1045,5000 1035,4990

## Silkscreen, mask and mechanical layers (free items; w line width, h text height)
Bottom Overlay:
  text "GROUP 6 - Five Band Equalizer" at 5435,1278.32 h100
Board:
  lines w19.68: 7115,5060 945,5060 930,5045 930,810 935,805 7115,805 7120,810 7120,5055